# Altium PCB broken_sodimm_stackup.PcbDoc (part 5 of 7)
Units mm, origin at the board's own origin, x right, y up, seen from the top; angles counter-clockwise.
Board outline 69.63 x 30.03 mm, 8 copper layers (TOP, SIGA__, L3, PWR4, L5, L6, SIGB__, BOTTOM), stack 1.2 mm thick; 199 components, 229 nets, 1321 pads, 785 vias.
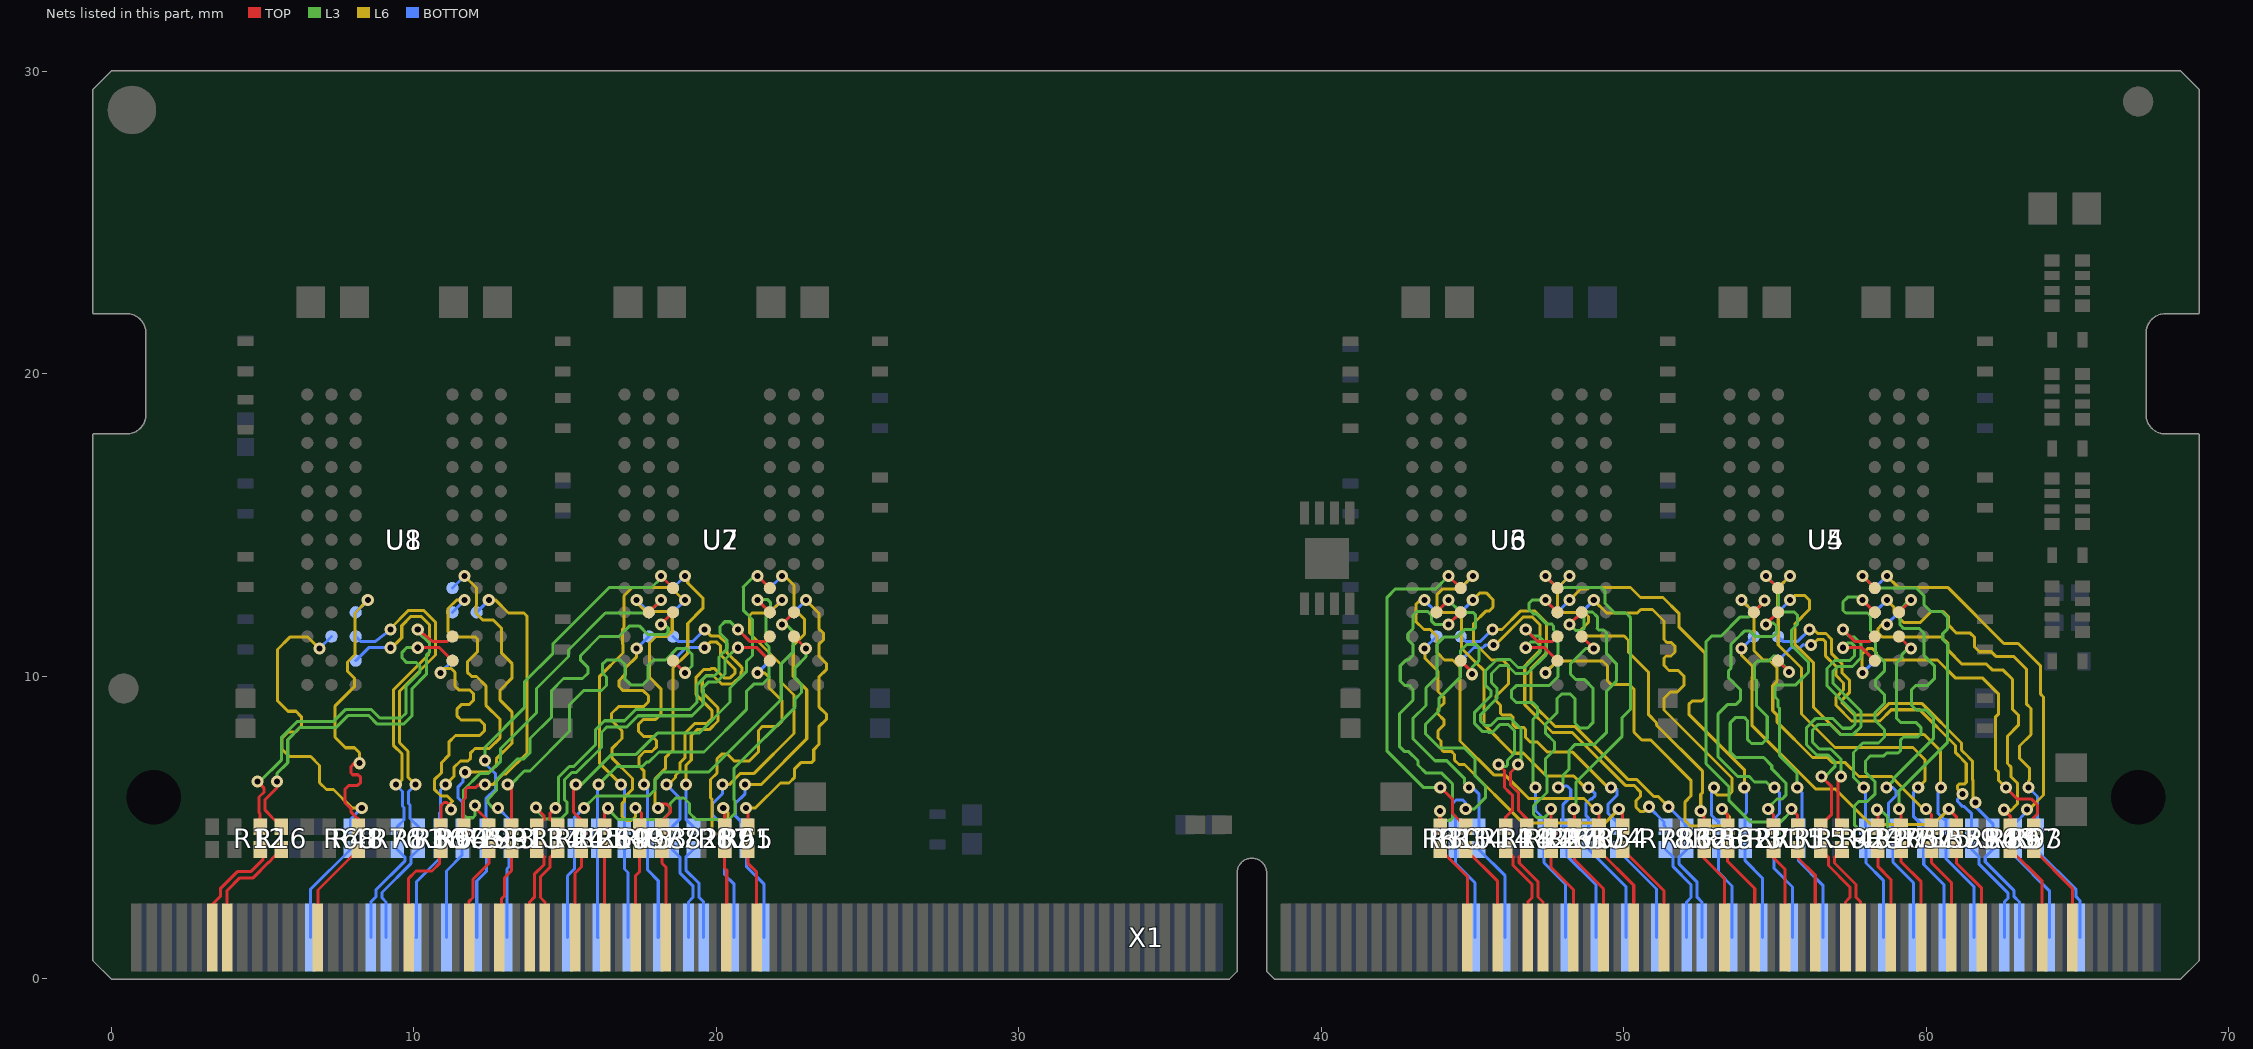
[diagram p10: the nets of this part, all layers, seen from the top]

## Via types
v1: diameter 0.4, hole 0.2, TOP to BOTTOM, tented both sides, 785 vias

## Nets (pads, with @x,y where several pads share a name; then routed paths per layer and width w, separated by ;. In a path a pad name is that pad's centre, name@x,y a point inside that pad or via, vN(x,y) a via of type N, cw(c..) or ccw(c..) an arc to the next point about the centre after c; other vN are vias at no path point) (continued)
DQ10R: R64.2 U8.D8 | length 10.4
  TOP w0.1: R64.2@11.639,5.025 11.62,5.044 11.62,5.896 11.7,5.976 11.7,6.254 11.767,6.321 12.045,6.321 12.142,6.418 v1(12.349,6.418)
  L6 w0.1: v1(12.349,6.418) 12.604,6.418 12.954,6.768 13.045,6.768 13.738,7.461 13.738,11.988 13.634,12.092 13.128,12.092 12.703,12.517 v1(12.473,12.517)
  BOTTOM w0.1: U8.D8@12.073,12.117 v1(12.473,12.517)
DQ11: R90.1 X1.42 | length 3.1
  BOTTOM w0.1: X1.42@11.075,1.365 11.075,3.565 11.59,4.08 R90.1@11.59,4.275
DQ11R: R90.2 U8.E7 | length 11.4
  L6 w0.1: v1(11.673,13.317) 12.073,12.917 12.073,12.351 12.05,12.328 12.05,12.086 12.281,11.855 12.627,11.855 12.898,11.584 12.898,10.762 13.248,10.412 13.248,9.948 12.848,9.548 12.848,9.212 13.248,8.812 13.248,7.798 12.724,7.274 12.724,7.063 12.49,6.829 v1(11.694,6.829)
  BOTTOM w0.1: U8.E7@11.273,12.917 v1(11.673,13.317) ; R90.2@11.59,5.025 11.624,5.059 11.624,5.82 11.448,5.996 11.448,6.334 11.624,6.51 11.624,6.759 v1(11.694,6.829)
DQ12: R68.1 X1.24 | length 3.5
  BOTTOM w0.1: X1.24@6.575,1.365 6.575,2.952 R68.1@7.898,4.275
DQ12R: R68.2 U8.C2 | length 11
  L6 w0.1: v1(6.873,10.917) 6.498,11.292 5.897,11.292 5.49,10.885 5.49,9.188 5.833,8.845 6.097,8.845 6.276,8.666 6.276,8.354 6.087,8.165 5.85,8.165 5.643,7.958 5.643,7.58 5.877,7.346 6.586,7.346 6.88,7.052 6.88,6.483 7.107,6.256 7.336,6.256 7.94,5.652 v1(8.274,5.652)
  BOTTOM w0.1: v1(6.873,10.917) U8.C2@7.273,11.317 ; R68.2@7.898,5.025 7.898,5.276 v1(8.274,5.652)
DQ13: R48.1 X1.25 | length 3.5
  TOP w0.09: X1.25@6.825,1.365 6.825,2.937 R48.1@8.163,4.275
  TOP w0.1: R48.1@8.126,4.316 R48.1@8.163,4.35
DQ13R: R48.2 U8.D3 | length 10.3
  TOP w0.1: R48.2@8.163,5.025 8.163,5.302 8.129,5.302 7.924,5.507 7.924,5.622 7.716,5.83 7.716,6.258 7.853,6.395 8.138,6.395 8.236,6.493 8.236,6.66 8.15,6.746 7.974,6.746 7.915,6.805 7.915,7.015 8.027,7.127 v1(8.202,7.127)
  L6 w0.1: v1(8.202,7.127) 8.202,7.47 8.034,7.639 7.737,7.639 7.387,7.989 7.387,9.014 7.4,9.027 8.04,9.667 8.04,9.931 7.805,10.166 7.805,10.475 8.048,10.718 8.048,12.092 v1(8.473,12.517)
  BOTTOM w0.1: U8.D3@8.073,12.117 v1(8.473,12.517)
DQ14: R86.1 X1.38 | length 3.2
  BOTTOM w0.1: X1.38@10.075,1.365 10.08,1.37 10.08,3.21 10.877,4.007 R86.1@10.877,4.275
DQ14R: R86.2 U8.D7 | length 11.2
  L6 w0.1: v1(11.049,6.418) 11.319,6.688 11.319,6.985 11.538,7.204 11.784,7.204 11.876,7.296 11.876,7.476 12.017,7.617 12.492,7.617 12.848,7.973 12.848,8.573 12.374,9.047 12.374,9.686 12.067,9.993 11.909,9.993 11.763,10.139 11.763,10.477 12.098,10.812 12.098,11.228 12.034,11.292 11.298,11.292 11.127,11.463 11.127,12.241 11.403,12.517 v1(11.673,12.517)
  BOTTOM w0.1: R86.2@10.877,5.025 10.84,5.062 10.84,5.473 10.874,5.507 10.874,6.243 v1(11.049,6.418) ; U8.D7@11.273,12.117 v1(11.673,12.517)
DQ15: R60.1 X1.37 | length 3.6
  TOP w0.1: X1.37@9.825,1.365 9.825,3.322 10.069,3.566 10.595,3.566 10.848,3.819 R60.1@10.848,4.237
DQ15R: R60.2 U8.B7 | length 9.8
  TOP w0.1: R60.2@10.886,5.025 10.886,5.718 10.993,5.825 11.087,5.825 11.202,5.71 v1@11.202,5.604
  L6 w0.1: v1(10.873,10.117) 11.015,10.259 11.231,10.259 11.359,10.131 11.359,9.674 11.48,9.553 11.836,9.553 11.973,9.416 11.973,9.216 11.818,9.061 11.562,9.061 11.426,8.925 11.426,8.683 11.556,8.553 12.177,8.553 12.328,8.402 12.328,8.198 12.173,8.042 11.374,8.042 11.154,7.822 11.154,7.387 10.916,7.149 10.916,6.82 10.674,6.578 10.674,6.262 10.893,6.043 11.101,6.043 11.274,5.87 v1@11.2,5.796
  BOTTOM w0.1: v1(10.873,10.117) U8.B7@11.273,10.517
  other v1: 11.23,5.6
DQ16: R33.1 X1.50 | length 3
  BOTTOM w0.1: X1.50@13.075,1.365 13.075,3.635 13.14,3.7 13.14,4.238 R33.1@13.177,4.275
DQ16R: R33.2 U2.D7 | length 12.5
  TOP w0.1: v1(18.163,11.717) U2.D7@18.563,12.117
  L3 w0.1: v1(12.774,5.652) 12.608,5.652 12.451,5.809 12.451,5.947 12.728,6.224 12.728,6.578 13.424,7.274 13.64,7.274 13.839,7.473 13.839,7.945 14.55,8.656 14.55,9.533 14.945,9.928 15.573,9.928 15.758,10.113 15.758,10.282 15.509,10.531 15.509,10.689 16.135,11.315 16.775,11.315 17.129,11.669 17.443,11.669 17.737,11.375 18.324,11.375 18.406,11.457 18.406,11.59 18.279,11.717 v1(18.163,11.717)
  BOTTOM w0.1: v1(12.774,5.652) 13.177,5.249 R33.2@13.177,5.025
DQ17: R9.1 X1.49 | length 3.1
  TOP w0.1: X1.49@12.825,1.365 12.89,1.43 12.89,2.65 12.99,2.75 12.99,3.34 13.225,3.575 R9.1@13.225,4.275
DQ17R: R9.2 U2.B7 | length 13.1
  TOP w0.1: v1(13.099,6.418) 13.225,6.292 R9.2@13.225,5.025 ; U2.B7@18.563,10.517 v1(18.963,10.117)
  L3 w0.1: v1(13.099,6.418) 13.198,6.418 13.65,6.87 13.832,6.87 15.136,8.174 15.136,9.055 15.609,9.528 16.2,9.528 16.365,9.693 16.365,9.978 16.228,10.115 16.228,10.4 16.363,10.535 16.83,10.535 16.984,10.381 16.984,9.896 17.163,9.717 17.57,9.717 17.738,9.885 17.738,10.363 17.917,10.542 18.318,10.542 18.703,10.927 18.997,10.927 19.19,10.734 19.19,10.344 v1(18.963,10.117)
DQ18: R45.1 X1.62 | length 2.9
  BOTTOM w0.1: R45.1@16.07,4.275 16.07,1.37 X1.62@16.075,1.365
DQ18R: R45.2 U2.D3 | length 12.4
  TOP w0.1: v1(21.363,12.517) U2.D3@21.763,12.117
  L3 w0.1: v1@16.143,6.462 16.703,7.022 17.546,7.022 17.692,7.168 17.765,7.168 18.097,7.5 19.591,7.5 20.988,8.897 20.988,9.498 21.232,9.742 21.518,9.742 21.738,9.962 21.738,10.975 21.631,11.082 21.631,11.963 21.781,12.113 21.781,12.444 21.68,12.545 21.384,12.545 21.363,12.524 v1(21.363,12.517)
  BOTTOM w0.1: R45.2@16.07,5.025 16.06,5.035 16.06,6.379 v1(16.099,6.418)
DQ19: R25.1 X1.63 | length 2.9
  TOP w0.1: R25.1@16.3,4.275 16.3,1.39 X1.63@16.325,1.365
DQ19R: R25.2 U2.C2 | length 13.3
  TOP w0.1: R25.2@16.3,4.95 R25.2@16.3,5.025 16.3,5.578 v1@16.362,5.64 ; U2.C2@22.563,11.317 v1(22.963,10.917)
  L3 w0.1: v1(16.41,5.64) 16.423,5.627 16.423,5.603 16.764,5.262 18.214,5.262 18.463,5.511 18.463,5.791 18.651,5.979 18.93,5.979 19.112,5.797 19.112,5.484 19.334,5.262 20.397,5.262 20.612,5.477 20.612,5.895 20.574,5.933 20.574,6.955 22.601,8.982 22.601,9.254 22.81,9.463 22.81,9.739 22.601,9.948 22.601,10.285 22.963,10.647 v1(22.963,10.917)
DQ20: R29.1 X1.46 | length 3
  BOTTOM w0.1: X1.46@12.075,1.365 12.075,3.235 12.395,3.555 R29.1@12.395,4.275
DQ20R: R29.2 U2.E7 | length 12.4
  TOP w0.1: v1(18.163,13.317) U2.E7@18.563,12.917
  L3 w0.1: v1(12.349,7.218) 12.349,7.659 13.648,8.958 13.648,9.811 14.601,10.764 14.601,11.085 16.452,12.936 17.854,12.936 18.163,13.245 v1(18.163,13.317)
  BOTTOM w0.1: v1(12.349,7.218) 12.349,7.118 12.699,6.768 12.699,6.273 12.374,5.948 12.374,5.046 R29.2@12.395,5.025
DQ21: R5.1 X1.45 | length 3.2
  TOP w0.1: X1.45@11.825,1.365 11.825,2.565 11.95,2.69 11.95,3.29 12.477,3.817 R5.1@12.477,4.275
DQ21R: R5.2 U2.D8 | length 13
  TOP w0.1: v1(12.02,5.73) 12.02,5.656 12.036,5.64 12.477,5.199 R5.2@12.477,5.025 ; U2.D8@17.763,12.117 v1(18.163,12.517)
  L3 w0.1: v1(12.02,5.73) 12.02,5.401 11.943,5.324 11.745,5.324 11.64,5.429 11.64,6.24 12.193,6.793 12.467,6.793 12.867,7.193 12.867,7.611 14.048,8.792 14.048,9.597 15.109,10.658 15.109,10.872 16.327,12.09 17.736,12.09 v1(18.163,12.517)
DQ22: R41.1 X1.58 | length 3
  BOTTOM w0.1: X1.58@15.075,1.365 15.075,3.405 15.3,3.63 R41.1@15.3,4.275
DQ22R: R41.2 U2.D2 | length 12.4
  TOP w0.1: v1(22.163,11.717) U2.D2@22.563,12.117
  L3 w0.1: v1(15.624,5.652) 16.015,6.043 17.757,6.043 17.974,6.26 17.974,6.585 18.23,6.841 19.752,6.841 20.283,7.372 21.588,8.677 22.142,9.231 22.142,10.412 22.538,10.808 22.538,11.478 22.299,11.717 v1(22.163,11.717)
  BOTTOM w0.1: R41.2@15.3,5.025 15.3,5.328 v1(15.624,5.652)
DQ23: R21.1 X1.59 | length 3.1
  TOP w0.1: X1.59@15.325,1.365 15.325,3.49 15.532,3.697 R21.1@15.532,4.275 R21.1@15.532,4.35
DQ23R: R21.2 U2.E3 | length 13.2
  TOP w0.1: v1(15.349,6.418) 15.274,6.343 15.274,5.507 15.532,5.249 R21.2@15.532,5.025 ; v1(21.363,13.317) U2.E3@21.763,12.917
  L3 w0.1: v1(15.349,6.418) 15.533,6.418 16.537,7.422 17.345,7.422 18.045,8.122 19.423,8.122 20.45,9.149 20.45,9.613 20.988,10.151 20.988,10.49 21.189,10.691 21.189,11.879 20.889,12.18 20.889,12.949 20.884,12.954 21.247,13.317 v1(21.363,13.317)
DQ24: R73.1 X1.70 | length 3.1
  BOTTOM w0.1: R73.1@17.724,4.275 17.724,3.596 18.075,3.245 X1.70@18.075,1.365
DQ24R: R73.2 U7.D2 | length 11.1
  L6 w0.1: v1(17.363,12.517) 17.363,12.438 17.659,12.142 18.373,12.142 18.538,11.977 18.538,11.49 18.367,11.319 18,11.319 17.784,11.103 17.784,9.966 18.161,9.589 18.161,8.752 17.989,8.58 17.585,8.58 17.428,8.423 17.428,8.176 17.593,8.011 17.877,8.011 18.013,7.875 18.013,7.655 17.869,7.511 17.624,7.511 17.436,7.323 17.436,7.041 17.599,6.878 v1(17.599,6.418)
  BOTTOM w0.1: v1(17.363,12.517) U7.D2@17.763,12.117 ; v1(17.599,6.418) 17.724,6.293 R73.2@17.724,5.025
DQ25: R53.1 X1.71 | length 3
  TOP w0.1: R53.1@18.199,4.35 R53.1@18.199,4.275 18.199,3.821 18.325,3.695 X1.71@18.325,1.365
DQ25R: R53.2 U7.E3 | length 10.6
  TOP w0.1: v1(18.074,5.652) 18.074,5.797 18.098,5.773 18.36,5.773 18.483,5.65 18.483,5.503 18.199,5.219 R53.2@18.199,5.025 R53.2@18.199,4.95
  L6 w0.1: v1(18.074,5.652) 17.974,5.752 17.974,6.612 18.309,6.947 18.309,7.311 18.561,7.563 18.561,10.272 19.051,10.762 19.051,11.748 19.549,12.246 19.549,12.588 19.051,13.086 19.051,13.22 v1@18.959,13.313
  BOTTOM w0.1: U7.E3@18.563,12.917 v1(18.963,13.317)
DQ26: R65.1 X1.83 | length 3.1
  TOP w0.1: R65.1@21.038,4.35 R65.1@21.038,4.275 21.038,3.822 21.325,3.535 X1.83@21.325,1.365
DQ26R: R65.2 U7.D8 | length 10.4
  TOP w0.1: v1(20.974,5.652) 21.038,5.588 R65.2@21.038,5.025 R65.2@21.038,4.95
  L6 w0.1: v1(20.974,5.652) 21.293,5.652 22.117,6.476 22.396,6.476 22.585,6.665 22.585,6.944 22.788,7.147 23.14,7.147 23.216,7.223 23.216,7.575 23.385,7.744 23.385,8.334 23.642,8.591 23.642,8.74 23.385,8.997 23.385,9.974 23.631,10.22 23.631,10.426 23.385,10.672 23.385,11.056 23.544,11.215 23.544,11.417 23.385,11.576 23.385,12.095 v1(22.963,12.517)
  BOTTOM w0.1: U7.D8@22.563,12.117 v1(22.963,12.517)
DQ27: R91.1 X1.84 | length 3.2
  BOTTOM w0.1: R91.1@20.987,4.275 20.987,3.713 21.575,3.125 X1.84@21.575,1.365
DQ27R: R91.2 U7.E7 | length 11
  L6 w0.1: v1(20.949,6.418) 21.47,6.418 22.985,7.933 22.985,9.552 22.538,9.999 22.538,11.022 22.91,11.394 22.91,11.889 22.563,12.236 22.563,12.683 22.57,12.69 22.57,13.005 22.258,13.317 v1(22.163,13.317)
  BOTTOM w0.1: v1(20.949,6.418) 20.949,6.122 20.624,5.797 20.624,5.388 R91.2@20.987,5.025 ; U7.E7@21.763,12.917 v1(22.163,13.317)
DQ28: R69.1 X1.66 | length 3
  BOTTOM w0.1: R69.1@16.957,4.275 16.957,3.633 17.075,3.515 X1.66@17.075,1.365
DQ28R: R69.2 U7.D3 | length 11.3
  L6 w0.1: v1(16.849,6.418) 16.129,7.138 16.129,9.988 16.913,10.772 16.913,11.062 16.901,11.074 16.901,11.56 16.942,11.601 16.942,12.662 17.218,12.938 18.492,12.938 v1@18.858,12.572 ; v1@18.883,12.597 v1(18.963,12.517)
  BOTTOM w0.1: v1(16.849,6.418) 16.957,6.31 R69.2@16.957,5.025 R69.2@16.957,4.95 ; U7.D3@18.563,12.117 v1(18.963,12.517)
DQ29: R49.1 X1.67 | length 3
  TOP w0.1: X1.67@17.325,1.365 17.325,3.41 17.46,3.545 R49.1@17.46,4.275 R49.1@17.46,4.35
DQ29R: R49.2 U7.C2 | length 10.5
  TOP w0.1: v1(17.324,5.652) 17.348,5.652 17.519,5.481 17.519,5.084 R49.2@17.46,5.025 R49.2@17.46,4.95
  L6 w0.1: v1(17.324,5.652) 17.324,5.361 17.194,5.231 17.018,5.231 16.884,5.365 16.884,5.803 16.952,5.871 16.952,5.991 17.224,6.263 17.224,6.625 16.54,7.309 16.54,7.607 16.876,7.943 16.876,8.2 16.532,8.544 16.532,8.77 16.76,8.998 17.589,8.998 17.752,9.161 17.752,9.357 17.584,9.525 16.916,9.525 16.775,9.666 16.775,9.854 16.988,10.067 16.988,10.273 17.363,10.648 v1(17.363,10.917)
  BOTTOM w0.1: v1(17.363,10.917) U7.C2@17.763,11.317
DQ30: R61.1 X1.79 | length 3
  TOP w0.1: R61.1@20.268,4.35 R61.1@20.268,4.275 20.268,3.662 20.34,3.59 20.34,1.38 X1.79@20.325,1.365
DQ30R: R61.2 U7.B7 | length 10.5
  TOP w0.1: v1(20.224,5.652) 20.268,5.608 R61.2@20.268,5.025 R61.2@20.268,4.95
  L6 w0.1: v1(20.224,5.652) 20.378,5.498 20.378,4.891 20.28,4.793 19.963,4.793 19.849,4.907 19.849,5.94 19.805,5.984 19.805,6.586 20.018,6.799 20.018,7.273 20.17,7.425 20.363,7.425 20.594,7.194 21.079,7.194 21.388,7.503 21.388,8.21 21.525,8.347 21.989,8.347 22.16,8.518 22.16,9.199 21.729,9.63 21.729,9.975 21.587,10.117 v1(21.363,10.117)
  BOTTOM w0.1: v1(21.363,10.117) U7.B7@21.763,10.517
DQ31: R87.1 X1.80 | length 3
  BOTTOM w0.1: R87.1@20.269,4.275 20.269,3.451 20.575,3.145 X1.80@20.575,1.365
DQ31R: R87.2 U7.D7 | length 11.1
  L6 w0.1: v1(20.199,6.418) 20.419,6.418 20.794,6.793 21.248,6.793 22.566,8.111 22.566,9.379 22.134,9.811 22.134,10.39 21.09,11.434 21.09,12.004 21.178,12.092 21.738,12.092 v1(22.163,12.517)
  BOTTOM w0.1: v1(20.199,6.418) 20.199,6.122 19.874,5.797 19.874,5.484 19.87,5.48 19.87,5.424 R87.2@20.269,5.025 ; U7.D7@21.763,12.117 v1(22.163,12.517)
DQ32: R34.1 X1.174 | length 3.3
  BOTTOM w0.1: R34.1@45.205,4.275 46.075,3.405 X1.174@46.075,1.365
DQ32R: R34.2 U3.D8 | length 11.2
  TOP w0.1: U3.D8@43.803,12.117 v1(44.203,12.517)
  L3 w0.1: v1(44.203,12.517) 44.618,12.103 45.025,12.103 45.088,12.04 45.088,11.604 45.024,11.54 44.722,11.54 44.474,11.292 44.048,11.292 43.828,11.072 43.828,9.993 43.456,9.621 43.456,9.037 43.022,8.603 43.022,7.944 43.757,7.209 44.143,7.209 44.734,6.618 44.734,6.463 v1(44.879,6.318)
  BOTTOM w0.1: v1(44.879,6.318) 44.941,6.38 45.205,6.116 R34.2@45.205,5.025
DQ33: R10.1 X1.173 | length 3.3
  TOP w0.1: R10.1@44.772,4.275 45.825,3.222 X1.173@45.825,1.365
DQ33R: R10.2 U3.E7 | length 11.9
  TOP w0.1: v1(43.929,6.318) 43.952,6.318 44.33,5.94 44.33,5.467 R10.2@44.772,5.025 ; v1(44.203,13.317) U3.E7@44.603,12.917
  L3 w0.1: v1(43.929,6.318) 43.378,6.318 42.174,7.522 42.174,12.618 42.448,12.892 43.778,12.892 v1(44.203,13.317)
DQ34: R26.1 X1.187 | length 3.3
  TOP w0.1: R26.1@48.365,4.275 48.365,3.935 49.325,2.975 X1.187@49.325,1.365
DQ34R: R26.2 U3.E3 | length 12
  TOP w0.1: v1(47.403,13.317) U3.E3@47.803,12.917 ; v1(48.34,5.61) 48.365,5.585 R26.2@48.365,5.025
  L3 w0.1: v1(47.403,13.317) 47.778,12.942 49.245,12.942 49.378,12.809 49.378,12.408 49.694,12.092 50.066,12.092 50.223,11.935 50.223,8.922 49.942,8.641 49.942,8.02 48.409,6.487 48.409,5.619 48.35,5.56 48.34,5.57 v1(48.34,5.61)
DQ35: R46.1 X1.186 | length 3.3
  BOTTOM w0.1: R46.1@48.111,4.275 48.111,4.069 49.075,3.105 X1.186@49.075,1.365
DQ35R: R46.2 U3.D2 | length 11.3
  TOP w0.1: v1(48.203,11.717) U3.D2@48.603,12.117
  L3 w0.1: v1(47.829,6.318) 47.982,6.471 47.982,6.724 48.182,6.924 48.182,7.543 48.39,7.751 49.028,7.751 49.428,8.151 49.428,9.517 49.75,9.839 49.75,10.42 49.428,10.742 49.428,11.434 49.332,11.53 49.166,11.53 49.116,11.58 49.122,11.586 49.122,11.965 48.961,12.126 48.752,12.126 48.676,12.05 48.676,11.571 48.627,11.522 48.398,11.522 v1(48.203,11.717)
  BOTTOM w0.1: v1(47.829,6.318) 47.886,6.375 48.123,6.375 48.242,6.256 48.242,6.022 47.99,5.77 47.99,5.755 47.99,5.465 47.99,5.025 R46.2@48.111,5.025
DQ36: R30.1 X1.170 | length 3.2
  BOTTOM w0.1: R30.1@44.429,4.275 44.429,3.821 45.075,3.175 X1.170@45.075,1.365
DQ36R: R30.2 U3.B7 | length 11.3
  TOP w0.1: U3.B7@44.603,10.517 44.99,10.13 44.98,10.12 v1(44.98,10.07)
  L3 w0.1: v1(44.77,5.61) 45.045,5.61 45.418,5.983 45.418,6.376 45.07,6.724 45.07,7.281 44.724,7.627 43.914,7.627 43.447,8.094 43.447,8.422 43.892,8.867 43.892,9.276 44.601,9.985 44.601,10.853 44.796,11.048 45.121,11.048 45.213,10.956 45.213,10.535 44.98,10.302 v1(44.98,10.07)
  BOTTOM w0.1: R30.2@44.429,5.025 44.429,5.359 44.34,5.448 44.34,5.8 44.448,5.908 44.675,5.908 44.77,5.813 v1(44.77,5.61)
DQ37: R6.1 X1.169 | length 3.2
  TOP w0.1: R6.1@43.984,4.217 44.825,3.376 X1.169@44.825,1.365
DQ37R: R6.2 U3.D7 | length 12
  TOP w0.1: R6.2@43.926,4.95 R6.2@43.926,5.025 v1(43.926,5.55) ; v1(44.203,11.717) U3.D7@44.603,12.117
  L3 w0.1: v1(43.926,5.55) 43.926,5.304 43.996,5.234 44.258,5.234 44.332,5.308 44.332,6.445 43.977,6.8 43.462,6.8 43.195,7.067 43.195,7.205 42.889,7.511 42.751,7.511 42.574,7.688 42.574,8.758 43.028,9.212 43.028,9.573 42.899,9.702 42.748,9.702 42.605,9.845 42.605,10.349 42.791,10.535 42.866,10.535 43.028,10.697 43.028,11.044 42.86,11.212 42.86,11.409 43.028,11.577 43.028,12.023 43.145,12.14 43.518,12.14 43.643,12.015 43.643,11.822 43.748,11.717 v1(44.203,11.717)
DQ38: R22.1 X1.183 | length 3.2
  TOP w0.1: R22.1@47.59,4.275 47.59,3.69 48.325,2.955 X1.183@48.325,1.365
DQ38R: R22.2 U3.C2 | length 12
  TOP w0.1: R22.2@47.59,5.025 v1(47.59,5.61) ; U3.C2@48.603,11.317 v1(49.003,10.917)
  L3 w0.1: v1(47.59,5.61) 47.59,5.55 47.369,5.329 47.126,5.329 47.011,5.444 47.011,5.72 47.454,6.163 47.454,6.698 47.401,6.751 47.401,7.269 47.706,7.574 47.706,7.831 47.403,8.134 47.403,8.404 47.79,8.791 47.79,9.267 47.94,9.417 48.225,9.417 48.382,9.26 48.382,8.46 48.549,8.293 48.801,8.293 48.973,8.465 48.973,9.617 48.7,9.89 48.417,9.89 48.236,10.071 48.236,10.417 48.736,10.917 v1(49.003,10.917)
DQ39: R42.1 X1.182 | length 3.2
  BOTTOM w0.1: R42.1@47.361,4.275 47.361,3.839 48.075,3.125 X1.182@48.075,1.365
DQ39R: R42.2 U3.D3 | length 11.3
  TOP w0.1: v1(47.403,12.517) U3.D3@47.803,12.117
  L3 w0.1: v1(47.079,6.318) 46.991,6.406 46.991,8.579 47.149,8.737 47.149,8.97 46.983,9.136 46.438,9.136 46.284,9.29 46.284,9.54 46.436,9.692 47.523,9.692 47.828,9.997 47.828,11.39 47.675,11.543 47.675,11.661 47.601,11.735 47.434,11.735 47.103,12.066 47.009,12.066 46.854,12.221 46.854,12.408 46.963,12.517 v1(47.403,12.517)
  BOTTOM w0.1: v1(47.079,6.318) 47.079,5.566 47.361,5.284 R42.2@47.361,5.025
DQ40: R54.1 X1.195 | length 3.5
  TOP w0.1: R54.1@49.959,4.275 51.325,2.909 X1.195@51.325,1.365 ; R54.1@49.959,4.35 R54.1@49.996,4.311
DQ40R: R54.2 U6.C2 | length 12.3
  TOP w0.1: v1(49.83,5.61) 49.959,5.481 R54.2@49.959,5.025
  L6 w0.1: v1(43.403,10.917) 43.428,10.892 43.428,10.588 43.853,10.163 43.853,9.498 44.056,9.295 44.056,9.121 43.853,8.918 43.853,8.756 44.045,8.564 44.045,8.392 43.853,8.2 43.853,7.962 43.955,7.859 43.955,7.595 44.03,7.52 44.294,7.52 44.398,7.416 44.398,7.229 44.545,7.082 44.733,7.082 46.672,5.143 49.363,5.143 v1(49.83,5.61)
  BOTTOM w0.1: v1(43.403,10.917) U6.C2@43.803,11.317
DQ41: R74.1 X1.194 | length 3.5
  BOTTOM w0.1: R74.1@49.771,4.275 51.075,2.971 X1.194@51.075,1.365
DQ41R: R74.2 U6.D3 | length 13.1
  L6 w0.1: v1(45.003,12.517) 45.245,12.759 45.445,12.759 45.673,12.531 45.673,12.284 45.555,12.166 45.452,12.166 45.03,11.744 45.03,11.132 45.62,10.542 45.993,10.542 46.185,10.35 46.185,9.753 45.778,9.346 45.778,9.186 45.921,9.043 45.921,8.776 45.978,8.719 46.26,8.719 46.339,8.64 46.339,8.39 46.414,8.316 46.679,8.316 46.745,8.249 46.745,7.983 46.9,7.828 47.136,7.828 47.473,7.491 48.307,7.491 49.48,6.318 v1(49.579,6.318)
  BOTTOM w0.1: U6.D3@44.603,12.117 v1(45.003,12.517) ; v1(49.579,6.318) 49.706,6.318 49.777,6.247 49.777,6.075 49.48,5.778 49.48,5.465 49.771,5.174 R74.2@49.771,5.025
DQ42: R66.1 X1.207 | length 3.4
  TOP w0.1: R66.1@53.431,4.35 R66.1@53.431,4.275 53.431,3.879 54.325,2.985 X1.207@54.325,1.365
DQ42R: R66.2 U6.B7 | length 12.5
  TOP w0.1: v1(53.24,5.61) 53.431,5.419 R66.2@53.431,5.025
  L6 w0.1: v1(47.403,10.117) 47.793,10.507 49.294,10.507 49.454,10.347 49.454,9.845 49.564,9.735 50.169,9.735 50.33,9.574 50.33,8.154 50.592,7.892 50.888,7.892 52.213,6.567 52.213,6.041 52.024,5.852 52.024,5.225 52.196,5.053 53.317,5.053 53.482,5.218 53.482,5.368 v1(53.24,5.61)
  BOTTOM w0.1: v1(47.403,10.117) U6.B7@47.803,10.517
DQ43: R92.1 X1.208 | length 3.2
  BOTTOM w0.1: R92.1@54.006,4.35 R92.1@54.006,4.275 54.006,3.904 54.575,3.335 X1.208@54.575,1.365
DQ43R: R92.2 U6.D7 | length 13.4
  L6 w0.1: v1(48.203,12.517) 48.581,12.895 48.815,12.895 48.858,12.938 50.219,12.938 50.55,12.607 51.295,12.607 51.816,12.086 51.816,11.637 52.688,10.765 52.688,9.297 52.577,9.186 52.256,9.186 52.146,9.076 52.146,8.746 53.979,6.913 v1(53.979,6.318)
  BOTTOM w0.1: U6.D7@47.803,12.117 v1(48.203,12.517) ; v1(53.979,6.318) 54.083,6.318 54.054,6.289 54.054,5.495 54.006,5.447 R92.2@54.006,5.025
DQ44: R50.1 X1.191 | length 3.4
  TOP w0.1: R50.1@49.177,4.275 49.177,4.243 50.325,3.095 X1.191@50.325,1.365 ; R50.1@49.177,4.35 R50.1@49.213,4.304
DQ44R: R50.2 U6.D2 | length 12.4
  TOP w0.1: v1(49.1,5.61) 49.177,5.533 R50.2@49.177,5.025
  L6 w0.1: v1(43.403,12.517) 43.262,12.517 43.122,12.377 43.122,11.815 43.392,11.545 43.6,11.545 43.828,11.317 43.828,10.78 44.068,10.54 44.335,10.54 44.58,10.295 44.58,7.865 45.715,6.73 46.081,6.73 46.851,5.96 48.68,5.96 49.03,5.61 v1(49.1,5.61)
  BOTTOM w0.1: v1(43.403,12.517) U6.D2@43.803,12.117
DQ45: R70.1 X1.190 | length 3.4
  BOTTOM w0.1: R70.1@48.835,4.275 50.075,3.035 X1.190@50.075,1.365
DQ45R: R70.2 U6.E3 | length 13.1
  L6 w0.1: v1(45.003,13.317) 44.578,12.892 44.011,12.892 43.828,12.709 43.828,12.305 44.022,12.111 44.43,12.111 44.628,11.913 44.628,10.932 45.068,10.492 45.378,10.182 45.378,8.396 46.317,7.457 46.683,7.457 47.436,6.704 48.337,6.704 48.723,6.318 v1(48.829,6.318)
  BOTTOM w0.1: U6.E3@44.603,12.917 v1(45.003,13.317) ; v1(48.829,6.318) 48.854,6.318 49.05,6.122 49.05,6.055 48.94,5.946 48.895,5.946 48.74,5.791 48.74,5.405 48.835,5.31 R70.2@48.835,5.025
DQ46: R62.1 X1.203 | length 3.3
  TOP w0.1: R62.1@52.649,4.35 R62.1@52.649,4.275 52.649,3.981 53.325,3.305 X1.203@53.325,1.365
DQ46R: R62.2 U6.E7 | length 12.6
  TOP w0.1: v1(52.54,5.55) 52.649,5.441 R62.2@52.649,5.025
  L6 w0.1: v1(48.203,13.317) 47.803,12.917 47.803,12.219 47.905,12.117 48.692,12.117 48.83,11.979 48.83,11.792 48.57,11.532 48.57,11.407 48.647,11.33 50.007,11.33 50.153,11.184 50.153,10.793 50.819,10.127 50.819,8.725 51.08,8.464 51.08,8.385 52.604,6.861 52.604,6.163 52.54,6.098 v1(52.54,5.55)
  BOTTOM w0.1: U6.E7@47.803,12.917 v1(48.203,13.317)
DQ47: R88.1 X1.204 | length 3.1
  BOTTOM w0.1: R88.1@53.133,4.275 53.133,3.507 53.575,3.065 X1.204@53.575,1.365
DQ47R: R88.2 U6.D8 | length 13.5
  L6 w0.1: v1(49.003,12.517) 49.428,12.092 50.445,12.092 50.56,12.207 50.943,12.207 51.322,11.828 51.322,11.214 51.419,11.117 51.564,11.117 51.687,10.994 51.687,10.802 51.554,10.669 51.394,10.669 51.322,10.597 51.322,10.364 51.493,10.193 51.798,10.193 51.988,10.003 51.988,9.705 51.765,9.482 51.533,9.482 51.322,9.271 51.322,8.89 53.576,6.636 53.576,6.187 53.459,6.07 53.095,6.07 52.979,6.186 v1(52.979,6.318)
  BOTTOM w0.1: U6.D8@48.603,12.117 v1(49.003,12.517) ; v1(52.979,6.318) 52.89,6.229 52.89,5.415 53.095,5.21 53.133,5.21 R88.2@53.133,5.025
DQ48: R35.1 X1.216 | length 3.2
  BOTTOM w0.1: R35.1@55.778,4.275 55.778,3.892 56.575,3.095 X1.216@56.575,1.365
DQ48R: R35.2 U4.E7 | length 11.1
  TOP w0.1: v1(54.693,13.317) U4.E7@55.093,12.917
  L3 w0.1: v1(54.693,13.317) 55.11,12.9 55.11,12.25 55.228,12.132 55.619,12.132 55.742,12.009 55.742,11.736 55.538,11.532 55.538,11.028 56.099,10.467 56.099,10.136 55.68,9.717 55.077,9.717 54.99,9.63 54.99,9.32 55.093,9.217 55.093,8.984 55.147,8.93 55.147,7.377 55.729,6.795 v1(55.729,6.318)
  BOTTOM w0.1: v1(55.729,6.318) 55.89,6.157 55.89,5.137 R35.2@55.778,5.025
DQ49: R11.1 X1.215 | length 3.2
  TOP w0.1: R11.1@55.741,4.35 R11.1@55.741,4.275 55.741,4.009 56.325,3.425 X1.215@56.325,1.365
DQ49R: R11.2 U4.D8 | length 11.9
  TOP w0.1: U4.D8@54.293,12.117 54.67,12.494 54.654,12.51 v1(54.65,12.51) ; v1(55.54,5.61) 55.741,5.409 R11.2@55.741,5.025
  L3 w0.1: v1(54.65,12.51) 54.654,12.51 54.67,12.494 54.141,11.965 53.848,11.965 53.213,11.33 52.9,11.33 52.715,11.145 52.715,7.112 53.468,6.359 53.468,5.902 54.193,5.177 55.167,5.177 55.54,5.55 v1(55.54,5.61)
DQ50: R47.1 X1.228 | length 3.2
  BOTTOM w0.1: R47.1@58.896,4.275 58.896,3.854 59.575,3.175 X1.228@59.575,1.365
DQ50R: R47.2 U4.D2 | length 11.1
  TOP w0.1: U4.D2@59.093,12.117 v1(59.493,12.517)
  L3 w0.1: v1(58.679,6.318) 58.906,6.545 58.906,6.614 60.23,7.938 60.23,8.646 59.997,8.879 59.674,8.879 59.503,9.05 59.503,9.549 59.654,9.7 60.041,9.7 60.273,9.932 60.273,10.337 59.913,10.697 59.913,11.434 59.772,11.575 59.254,11.575 59.126,11.703 59.126,12.209 59.434,12.517 v1(59.493,12.517)
  BOTTOM w0.1: v1(58.679,6.318) 58.892,6.318 58.987,6.223 58.987,6.042 58.74,5.795 58.74,5.181 R47.2@58.896,5.025
DQ51: R27.1 X1.229 | length 3.2
  TOP w0.1: R27.1@59.161,4.275 59.161,3.869 59.825,3.205 X1.229@59.825,1.365
DQ51R: R27.2 U4.E3 | length 11.9
  TOP w0.1: v1(57.893,13.317) U4.E3@58.293,12.917 ; v1(59.1,5.61) 59.161,5.549 R27.2@59.161,5.025
  L3 w0.1: v1(57.893,13.317) 58.291,12.919 59.664,12.919 59.918,12.665 59.918,12.362 60.139,12.141 60.506,12.141 60.704,11.943 60.704,11.575 60.54,11.411 60.54,11.215 60.704,11.051 60.704,7.824 59.1,6.22 v1(59.1,5.61)
DQ52: R7.1 X1.211 | length 3.1
  TOP w0.1: R7.1@54.946,4.35 R7.1@54.946,4.275 54.946,4.004 55.325,3.625 X1.211@55.325,1.365
DQ52R: R7.2 U4.B7 | length 12
  TOP w0.1: v1(54.77,5.61) 54.946,5.434 R7.2@54.946,5.025 ; U4.B7@55.093,10.517 55.46,10.15 v1(55.46,10.14)
  L3 w0.1: v1(54.77,5.61) 54.77,5.655 55.058,5.943 55.23,5.943 55.354,6.067 55.354,6.476 54.887,6.943 54.887,7.047 54.618,7.316 53.697,7.316 53.515,7.498 53.515,8.462 53.696,8.643 53.973,8.643 54.092,8.524 54.092,7.904 54.216,7.78 54.573,7.78 54.738,7.945 54.738,8.672 54.39,9.02 54.39,9.86 54.32,9.93 54.32,10.418 54.402,10.5 54.775,10.5 54.95,10.675 55.082,10.675 55.163,10.594 55.163,10.49 55.475,10.178 v1@55.475,10.135 ; v1(55.46,10.14) 55.46,10.132 v1@55.475,10.117
DQ53: R31.1 X1.212 | length 3.2
  BOTTOM w0.1: R31.1@54.958,4.275 54.958,3.652 55.575,3.035 X1.212@55.575,1.365
DQ53R: R31.2 U4.D7 | length 11.1
  TOP w0.1: v1(54.693,11.717) U4.D7@55.093,12.117
  L3 w0.1: v1(54.693,11.717) 54.738,11.762 54.94,11.762 55.041,11.661 55.041,11.433 54.918,11.31 54.355,11.31 54.173,11.492 53.982,11.492 53.757,11.267 53.748,11.267 53.543,11.062 53.543,10.267 53.456,10.18 53.456,9.951 53.858,9.549 53.858,9.226 53.696,9.064 53.419,9.064 53.115,8.76 53.115,7.332 53.754,6.693 54.134,6.693 54.318,6.509 54.705,6.509 54.896,6.318 v1(54.979,6.318)
  BOTTOM w0.1: R31.2@54.958,5.025 54.958,5.283 55.14,5.465 55.14,6.157 v1(54.979,6.318)
DQ54: R43.1 X1.224 | length 3.1
  BOTTOM w0.1: R43.1@58.002,4.275 58.002,3.828 58.575,3.255 X1.224@58.575,1.365
DQ54R: R43.2 U4.D3 | length 11.1
  TOP w0.1: v1(57.893,12.517) U4.D3@58.293,12.117
  L3 w0.1: v1(57.893,12.517) 57.795,12.615 57.399,12.615 57.245,12.461 57.245,12.179 57.334,12.09 58.05,12.09 58.152,11.988 58.152,11.516 58.318,11.35 58.318,10.762 58.618,10.462 58.618,10.187 58.321,9.89 58.321,9.681 58.618,9.383 58.618,9.116 58.304,8.802 58.304,8.539 58.612,8.231 58.612,7.991 58.414,7.793 57.897,7.793 57.586,7.482 57.586,6.661 v1(57.929,6.318)
  BOTTOM w0.1: v1(57.929,6.318) 57.99,6.257 57.99,5.037 R43.2@58.002,5.025
DQ55: R23.1 X1.225 | length 3.1
  TOP w0.1: R23.1@58.393,4.275 58.393,3.717 58.825,3.285 X1.225@58.825,1.365
DQ55R: R23.2 U4.C2 | length 12
  TOP w0.1: v1(58.37,5.59) 58.393,5.567 R23.2@58.393,5.025 ; U4.C2@59.093,11.317 v1(59.493,10.917)
  L3 w0.1: v1(58.37,5.59) 58.481,5.59 58.521,5.55 58.721,5.35 58.721,4.983 58.648,4.91 57.791,4.91 57.626,5.075 57.626,5.727 57.768,5.869 58.055,5.869 58.304,6.118 58.304,6.509 57.986,6.827 57.986,7.204 58.152,7.37 58.592,7.37 58.688,7.466 59.065,7.466 59.15,7.551 59.15,7.901 59.241,7.992 59.718,7.992 59.817,8.091 59.817,8.313 59.651,8.479 59.146,8.479 59.018,8.607 59.018,10.442 59.186,10.61 59.186,10.716 59.387,10.917 v1(59.493,10.917)
DQ56: R55.1 X1.237 | length 3.3
  TOP w0.1: R55.1@60.989,4.35 R55.1@60.989,4.275 60.989,3.831 61.825,2.995 X1.237@61.825,1.365
DQ56R: R55.2 U5.C2 | length 12
  TOP w0.1: v1(60.74,5.61) 60.989,5.361 R55.2@60.989,5.025
  L6 w0.1: v1@53.881,10.917 53.881,10.703 54.243,10.341 54.243,9.972 54.23,9.959 54.23,8.38 56.33,6.28 56.98,6.28 58.162,5.098 60.228,5.098 v1(60.74,5.61)
  BOTTOM w0.1: v1(53.893,10.917) U5.C2@54.293,11.317
DQ57: R75.1 X1.236 | length 3.3
  BOTTOM w0.1: R75.1@60.643,4.275 60.643,3.977 61.575,3.045 X1.236@61.575,1.365
DQ57R: R75.2 U5.D3 | length 12.8
  L6 w0.1: v1(55.493,12.517) 55.644,12.668 55.983,12.668 56.13,12.521 56.13,12.212 55.66,11.742 55.66,11.046 55.706,11 55.71,11 56.271,10.439 56.271,8.972 57.167,8.076 59.925,8.076 60.465,7.536 60.465,6.332 v1(60.479,6.318)
  BOTTOM w0.1: U5.D3@55.093,12.117 v1(55.493,12.517) ; v1(60.479,6.318) 60.39,6.229 60.39,5.465 60.595,5.26 60.643,5.26 R75.2@60.643,5.025
DQ58: R67.1 X1.249 | length 3.5
  TOP w0.1: R67.1@63.545,4.275 64.825,2.995 X1.249@64.825,1.365 ; R67.1@63.545,4.35 R67.1@63.582,4.313
DQ58R: R67.2 U5.B7 | length 11.8
  TOP w0.1: v1(62.629,6.318) 62.997,5.95 63.465,5.95 63.67,5.745 63.67,5.455 63.545,5.33 R67.2@63.545,5.025
  L6 w0.1: v1(57.893,10.117) 57.869,10.141 57.869,10.728 58.066,10.925 58.202,10.925 58.343,10.784 58.343,10.638 58.439,10.542 60.366,10.542 60.969,9.939 61.862,9.939 62.39,9.411 62.39,8.761 62.278,8.649 62.278,6.936 62.39,6.824 62.39,6.557 v1(62.629,6.318)
  BOTTOM w0.1: v1(57.893,10.117) U5.B7@58.293,10.517
DQ59: R93.1 X1.250 | length 3.5
  BOTTOM w0.1: R93.1@63.658,4.275 63.658,4.232 64.95,2.94 64.95,2.71 65.075,2.585 X1.250@65.075,1.365
DQ59R: R93.2 U5.D7 | length 12.6
  L6 w0.1: v1(58.693,12.517) 58.934,12.276 58.934,12.094 59.248,11.78 59.799,11.78 60.154,12.135 60.555,12.135 60.735,11.955 60.735,11.687 60.996,11.426 61.451,11.426 61.596,11.281 61.596,10.97 61.754,10.812 62.146,10.812 62.309,10.649 62.896,10.649 63.303,10.241 63.303,9.091 63.457,8.937 63.457,8.072 63.08,7.695 63.08,7.287 63.4,6.967 63.4,6.568 63.379,6.547 v1(63.379,6.318)
  BOTTOM w0.1: U5.D7@58.293,12.117 v1(58.693,12.517) ; v1(63.379,6.318) 63.67,6.027 63.67,5.037 R93.2@63.658,5.025
DQ60: R71.1 X1.232 | length 3.2
  BOTTOM w0.1: R71.1@59.912,4.275 59.912,3.778 60.575,3.115 X1.232@60.575,1.365
DQ60R: R71.2 U5.E3 | length 12.9
  L6 w0.1: v1(55.493,13.317) 55.102,12.926 55.102,12.721 55.072,12.692 55.072,12.22 55.102,12.19 55.102,11.038 55.868,10.272 55.868,8.757 56.98,7.645 59.556,7.645 59.955,7.246 59.955,6.544 v1(59.729,6.318)
  BOTTOM w0.1: U5.E3@55.093,12.917 v1(55.493,13.317) ; v1(59.729,6.318) 59.58,6.169 59.58,5.357 R71.2@59.912,5.025
DQ61: R51.1 X1.233 | length 3.3
  TOP w0.1: R51.1@60.169,4.35 R51.1@60.169,4.275 60.169,3.841 60.825,3.185 X1.233@60.825,1.365
DQ61R: R51.2 U5.D2 | length 12.1
  TOP w0.1: v1(59.99,5.61) 60.169,5.431 R51.2@60.169,5.025
  L6 w0.1: v1(53.893,12.517) 54.302,12.108 54.302,10.848 54.608,10.542 54.798,10.542 55.068,10.272 55.068,9.84 54.92,9.692 54.92,8.864 55.068,8.716 55.068,8.484 56.233,7.319 56.726,7.319 56.888,7.157 57.305,7.157 57.771,6.69 58.85,6.69 59.354,6.163 59.907,5.61 v1(59.99,5.61)
  BOTTOM w0.1: v1(53.893,12.517) U5.D2@54.293,12.117
DQ62: R63.1 X1.245 | length 3.3
  TOP w0.1: R63.1@62.775,4.275 63.825,3.225 X1.245@63.825,1.365
DQ62R: R63.2 U5.D8 | length 11.9
  TOP w0.1: v1(62.56,5.59) 62.775,5.375 R63.2@62.775,5.025
  L6 w0.1: v1(58.693,11.717) 58.543,11.717 58.406,11.58 58.406,11.431 58.54,11.297 60.493,11.297 60.718,11.072 60.718,10.864 61.179,10.403 61.988,10.403 62.188,10.203 62.543,10.203 62.845,9.901 62.845,8.91 63.037,8.718 63.037,8.38 62.678,8.021 62.678,7.118 62.79,7.006 62.79,6.687 63.004,6.473 63.004,5.779 62.97,5.745 62.97,5.743 62.777,5.55 62.737,5.59 v1(62.56,5.59)
  BOTTOM w0.1: v1(58.693,11.717) U5.D8@59.093,12.117
DQ63: R89.1 X1.246 | length 3.4
  BOTTOM w0.1: R89.1@62.927,4.275 62.927,4.043 64.075,2.895 X1.246@64.075,1.365
DQ63R: R89.2 U5.E7 | length 12.7
  L6 w0.1: v1(58.693,13.317) 59.068,12.942 60.705,12.942 62.561,11.086 63.035,11.086 63.777,10.344 63.777,9.408 63.868,9.317 63.868,6.078 63.35,5.56 63.32,5.59 v1(63.32,5.6)
  BOTTOM w0.1: U5.E7@58.293,12.917 v1(58.693,13.317) ; R89.2@62.927,5.025 62.927,5.137 63.32,5.53 v1(63.32,5.6)
DQS0_N: R12.1 X1.11 | length 3.9
  TOP w0.1: X1.11@3.325,1.365 3.325,2.445 3.6,2.72 3.6,2.98 4.16,3.54 4.599,3.54 5.015,3.955 5.015,4.177 R12.1@4.917,4.275
DQS0_P: R16.1 X1.13 | length 3.9
  TOP w0.1: X1.13@3.825,1.365 3.825,2.922 4.243,3.34 4.682,3.34 5.192,3.85 5.204,3.85 5.292,3.938 5.292,3.95 R16.1@5.617,4.275
DQS0R_N: R12.2 U1.B3 | length 12.7
  TOP w0.1: v1(4.822,6.521) 5.047,6.296 5.047,6.178 4.879,6.01 4.879,5.492 4.917,5.454 R12.2@4.917,5.025 ; v1(10.125,10.945) 10.845,10.945 U1.B3@11.273,10.517
  L3 w0.1: v1(4.822,6.521) 4.902,6.521 5.627,7.246 5.627,7.989 6.152,8.514 7.349,8.514 7.745,8.91 8.58,8.91 8.87,8.62 9.57,8.62 9.74,8.79 9.74,9.679 10.199,10.138 10.199,10.337 10.086,10.45 9.761,10.45 9.608,10.603 9.608,10.8 9.753,10.945 v1(10.125,10.945)
DQS0R_P: R16.2 U1.C3 | length 12.7
  TOP w0.1: v1(5.472,6.521) 5.472,6.32 5.079,5.927 5.079,5.575 5.292,5.362 5.292,5.35 R16.2@5.617,5.025 ; v1(10.125,11.545) 10.615,11.155 11.111,11.155 U1.C3@11.273,11.317
  L3 w0.1: v1(5.472,6.521) 5.472,6.792 5.827,7.147 5.827,7.906 6.235,8.314 7.432,8.314 7.828,8.71 8.497,8.71 8.787,8.42 9.653,8.42 9.94,8.707 9.94,9.596 10.409,10.065 10.409,10.7 10.52,10.811 10.52,11.09 10.32,11.29 10.31,11.29 10.125,11.475 v1(10.125,11.545)
DQS1_N: R76.1 X1.32 | length 3.5
  BOTTOM w0.1: X1.32@8.575,1.365 8.575,2.54 8.74,2.705 8.74,2.934 9.696,3.89 9.696,4.025 R76.1@9.446,4.275
DQS1_P: R81.1 X1.34 | length 3.5
  BOTTOM w0.1: X1.34@9.075,1.365 9.075,2.54 8.94,2.675 8.94,2.851 9.896,3.807 9.896,4.025 R81.1@10.146,4.275
DQS1R_N: R76.2 U8.B3 | length 11
  L6 w0.1: v1(9.221,10.945) 9.266,10.945 9.596,11.275 9.596,11.673 9.904,11.982 10.233,11.982 10.51,11.704 10.51,10.786 10.487,10.763 10.487,10.718 9.318,9.549 9.318,7.725 9.604,7.439 9.604,6.578 9.444,6.418 v1(9.399,6.418)
  BOTTOM w0.1: U8.B3@8.073,10.517 8.501,10.945 v1(9.221,10.945) ; v1(9.399,6.418) 9.624,6.193 9.624,5.707 9.67,5.661 9.67,5.249 R76.2@9.446,5.025
DQS1R_P: R81.2 U8.C3 | length 11
  L6 w0.1: v1(9.221,11.545) 9.221,11.581 9.821,12.181 10.316,12.181 10.71,11.787 10.71,10.703 10.629,10.621 9.518,9.511 9.518,7.808 9.804,7.522 9.804,6.663 v1(10.049,6.418)
  BOTTOM w0.1: U8.C3@8.073,11.317 8.235,11.155 8.731,11.155 v1(9.221,11.545) ; v1(10.049,6.418) 9.824,6.193 9.824,5.79 9.87,5.744 9.87,5.301 R81.2@10.146,5.025
DQS2_N: R13.1 X1.53 | length 3.2
  TOP w0.1: X1.53@13.825,1.365 13.825,2.54 13.98,2.695 13.98,3.457 14.303,3.78 14.303,4.025 R13.1@14.053,4.275
DQS2_P: R17.1 X1.55 | length 3.2
  TOP w0.1: X1.55@14.325,1.365 14.325,2.54 14.18,2.685 14.18,3.374 14.503,3.697 14.503,4.025 R17.1@14.753,4.275
DQS2R_N: R13.2 U2.B3 | length 13
  TOP w0.1: v1(14.03,5.657) 14.303,5.384 14.303,5.275 R13.2@14.053,5.025 ; v1(20.715,10.945) 21.335,10.945 U2.B3@21.763,10.517
  L3 w0.1: v1(14.03,5.657) 14.029,5.604 14.347,5.277 14.847,5.277 15.055,5.485 15.055,5.845 14.971,5.929 14.971,6.57 15.219,6.818 15.367,6.818 16.196,7.647 16.196,8.144 16.383,8.331 17.042,8.331 17.288,8.578 17.407,8.696 19.191,8.696 19.563,9.068 19.563,9.566 19.561,9.568 19.561,9.639 19.727,9.805 20.001,9.805 20.282,10.085 20.282,10.558 20.669,10.945 v1(20.715,10.945)
DQS2R_P: R17.2 U2.C3 | length 13
  TOP w0.1: v1(14.68,5.652) 14.503,5.475 14.503,5.275 R17.2@14.753,5.025 ; v1(20.715,11.545) 21.105,11.155 21.601,11.155 U2.C3@21.763,11.317
  L3 w0.1: v1(14.68,5.652) 14.771,5.743 14.771,6.653 15.136,7.018 15.285,7.018 15.996,7.73 15.996,8.227 16.3,8.531 16.959,8.531 17.324,8.896 19.108,8.896 19.363,9.151 19.363,9.483 19.361,9.485 19.361,9.722 19.644,10.005 19.918,10.005 20.082,10.168 20.082,10.641 20.34,10.899 20.34,11.204 20.118,11.426 20.118,11.65 20.272,11.804 20.456,11.804 v1(20.715,11.545)
DQS3_N: R77.1 X1.74 | length 3.3
  BOTTOM w0.1: R77.1@18.539,4.275 18.789,4.025 18.789,3.508 19.22,3.077 19.22,2.685 19.075,2.54 X1.74@19.075,1.365
DQS3_P: R82.1 X1.76 | length 3.3
  BOTTOM w0.1: R82.1@19.239,4.275 18.989,4.025 18.989,3.591 19.42,3.16 19.42,2.695 19.575,2.54 X1.76@19.575,1.365
DQS3R_N: R77.2 U7.B3 | length 10.9
  L6 w0.1: v1(18.349,6.418) 18.41,6.418 18.649,6.657 18.649,6.718 18.799,6.868 18.799,7.15 18.966,7.317 18.966,8.125 19.275,8.434 19.674,8.434 19.848,8.608 19.848,8.877 19.33,9.395 19.33,9.974 19.586,10.23 19.802,10.23 19.823,10.251 19.947,10.251 20.248,9.95 20.455,9.95 20.618,10.113 20.618,10.229 20.14,10.707 20.14,11.001 20.014,11.128 19.794,11.128 v1(19.611,10.945)
  BOTTOM w0.1: v1(18.349,6.418) 18.789,5.978 18.789,5.275 R77.2@18.539,5.025 ; U7.B3@18.563,10.517 18.991,10.945 v1(19.611,10.945)
DQS3R_P: R82.2 U7.C3 | length 10.9
  L6 w0.1: v1(18.999,6.418) 18.999,7.067 19.166,7.234 19.166,8.042 19.358,8.234 19.757,8.234 20.048,8.525 20.048,8.96 19.53,9.478 19.53,9.891 19.669,10.03 19.885,10.03 20.165,9.75 20.538,9.75 20.818,10.03 20.818,10.146 20.839,10.167 20.839,10.291 20.818,10.312 20.34,10.79 20.34,11.084 20.096,11.328 19.828,11.328 v1(19.611,11.545)
  BOTTOM w0.1: U7.C3@18.563,11.317 18.725,11.155 19.221,11.155 v1(19.611,11.545) ; v1(18.999,6.418) 18.989,6.408 18.989,5.275 R82.2@19.239,5.025
DQS4_N: R14.1 X1.177 | length 3.3
  TOP w0.1: R14.1@46.089,4.275 46.339,4.025 46.339,3.747 46.96,3.126 46.96,2.675 46.825,2.54 X1.177@46.825,1.365
DQS4_P: R18.1 X1.179 | length 3.3
  TOP w0.1: R18.1@46.789,4.275 46.539,4.025 46.539,3.83 47.16,3.209 47.16,2.705 47.325,2.54 X1.179@47.325,1.365
DQS4R_N: R14.2 U3.B3 | length 12
  TOP w0.1: v1(45.86,7.08) 46.052,6.888 46.052,6.325 46.208,6.169 46.32,6.057 46.32,5.581 46.089,5.35 R14.2@46.089,5.025 ; R14.2@46.089,4.95 R14.2@46.126,4.988 ; v1(46.755,10.945) 47.375,10.945 U3.B3@47.803,10.517
  L3 w0.1: v1(45.86,7.08) 45.918,7.022 46.107,7.022 46.152,7.067 46.152,7.224 46.39,7.462 46.39,8.189 46.168,8.411 45.915,8.411 45.655,8.151 45.531,8.151 45.51,8.172 45.33,8.172 45.066,8.436 45.066,8.815 45.599,9.348 45.599,9.529 45.419,9.709 45.419,10.175 45.801,10.557 46.237,10.557 46.501,10.292 46.723,10.292 47.228,10.797 47.228,11.005 47.098,11.135 46.913,11.135 46.755,10.977 v1(46.755,10.945)
DQS4R_P: R18.2 U3.C3 | length 11.9
  TOP w0.1: v1(46.502,7.079) 46.502,7.068 46.252,6.818 46.252,6.408 46.52,6.14 46.52,5.561 46.789,5.292 R18.2@46.789,5.025 ; v1(46.755,11.545) 47.145,11.155 47.641,11.155 U3.C3@47.803,11.317
  L3 w0.1: v1(46.502,7.079) 46.59,7.167 46.59,7.685 46.59,8.272 46.251,8.611 45.832,8.611 45.813,8.592 45.593,8.372 45.413,8.372 45.266,8.519 45.266,8.732 45.799,9.265 45.799,9.612 45.619,9.792 45.619,10.092 45.883,10.356 46.154,10.356 46.419,10.092 46.806,10.092 47.428,10.714 47.428,11.088 47.181,11.335 46.965,11.335 v1(46.755,11.545)
DQS5_N: R78.1 X1.198 | length 3.3
  BOTTOM w0.1: R78.1@51.376,4.275 51.626,4.025 51.626,3.707 52.22,3.113 52.22,2.685 52.075,2.54 X1.198@52.075,1.365
DQS5_P: R83.1 X1.200 | length 3.3
  BOTTOM w0.1: R83.1@52.076,4.275 51.826,4.025 51.826,3.79 52.42,3.196 52.42,2.695 52.575,2.54 X1.200@52.575,1.365
DQS5R_N: R78.2 U6.B3 | length 13.2
  L6 w0.1: v1(45.69,11.03) 45.736,11.03 46.66,11.954 46.974,11.954 47.233,11.695 47.233,10.86 46.802,10.429 46.802,10.415 46.721,10.334 46.721,9.063 47.638,8.146 48.296,8.146 50.046,6.396 50.333,6.396 50.542,6.188 50.542,6.03 50.398,5.886 50.398,5.672 50.536,5.534 50.671,5.534 v1(50.824,5.687)
  BOTTOM w0.1: U6.B3@44.603,10.517 45.041,10.955 45.178,10.955 45.199,10.934 45.323,10.934 45.419,11.03 v1(45.69,11.03) ; v1(50.824,5.687) 51.326,5.185 51.326,5.075 R78.2@51.376,5.025
DQS5R_P: R83.2 U6.C3 | length 13.2
  L6 w0.1: v1(45.651,11.545) 45.968,11.545 46.577,12.154 47.057,12.154 47.433,11.778 47.433,10.763 46.921,10.251 46.921,9.146 47.721,8.346 48.378,8.346 50.128,6.596 50.416,6.596 50.989,6.024 51.137,6.024 v1(51.474,5.687)
  BOTTOM w0.1: U6.C3@44.603,11.317 44.765,11.155 45.261,11.155 v1(45.651,11.545) ; v1(51.474,5.687) 52.026,5.135 52.026,5.075 R83.2@52.076,5.025
DQS6_N: R15.1 X1.219 | length 3.4
  TOP w0.1: R15.1@56.51,4.275 56.76,4.025 56.76,3.747 57.47,3.037 57.47,2.685 57.325,2.54 X1.219@57.325,1.365
DQS6_P: R19.1 X1.221 | length 3.4
  TOP w0.1: R19.1@57.21,4.275 56.96,4.025 56.96,3.83 57.67,3.12 57.67,2.695 57.825,2.54 X1.221@57.825,1.365
DQS6R_N: R15.2 U4.B3 | length 12.2
  TOP w0.1: R15.2@56.51,5.025 R15.2@56.51,5.072 ; v1(56.532,6.687) 56.87,6.349 56.87,5.44 ; v1(57.245,10.945) 57.865,10.945 U4.B3@58.293,10.517 ; R15.2@56.51,5.072 56.51,5.08 56.87,5.44 ; R15.2@56.51,5.072 56.87,5.432 56.87,5.44
  L3 w0.1: v1(56.532,6.687) 56.652,6.687 56.972,7.007 56.972,7.178 56.753,7.398 56.374,7.398 56.033,7.739 56.033,8.301 56.345,8.613 56.898,8.613 57.228,8.283 57.5,8.283 57.635,8.418 57.635,8.761 56.711,9.686 56.711,10.257 56.981,10.527 57.471,10.527 57.63,10.686 57.63,10.998 57.53,11.098 57.398,11.098 v1(57.245,10.945)
DQS6R_P: R19.2 U4.C3 | length 11.7
  TOP w0.1: v1(57.182,6.687) 57.07,6.575 57.07,5.165 R19.2@57.21,5.025 ; v1(57.245,11.545) 57.635,11.155 58.131,11.155 U4.C3@58.293,11.317
  L3 w0.1: v1(57.182,6.687) 57.182,7.251 56.835,7.598 56.457,7.598 56.233,7.822 56.233,8.218 56.428,8.413 56.815,8.413 57.145,8.083 57.583,8.083 57.835,8.335 57.835,8.844 56.911,9.769 56.911,10.174 57.064,10.327 57.554,10.327 57.83,10.603 57.83,11.085 57.607,11.308 57.458,11.308 57.245,11.52 v1(57.245,11.545)
DQS7_N: R79.1 X1.240 | length 3.5
  BOTTOM w0.1: R79.1@61.495,4.275 61.745,4.025 61.745,3.787 62.69,2.842 62.69,2.655 62.575,2.54 X1.240@62.575,1.365
DQS7_P: R84.1 X1.242 | length 3.5
  BOTTOM w0.1: R84.1@62.195,4.275 61.945,4.025 61.945,3.87 62.89,2.925 62.89,2.725 63.075,2.54 X1.242@63.075,1.365
DQS7R_N: R79.2 U5.B3 | length 12.6
  L6 w0.1: v1(56.19,11.04) 56.231,11.04 56.406,11.215 56.594,11.215 56.656,11.153 56.656,10.684 57.017,10.323 57.017,10.024 57.262,9.779 57.262,9.555 57.017,9.31 57.017,9.032 57.523,8.526 58.466,8.526 58.835,8.895 59.776,8.895 60.961,7.71 60.961,7.471 60.979,7.453 60.985,7.453 61.19,7.248 61.19,7.242 61.316,7.116 61.316,6.494 61.267,6.445 61.091,6.445 61.034,6.388 61.034,6.271 v1(61.192,6.113)
  BOTTOM w0.1: U5.B3@55.093,10.517 55.531,10.955 55.668,10.955 55.689,10.934 55.813,10.934 55.929,11.05 55.939,11.04 v1(56.19,11.04) ; v1(61.192,6.113) 61.027,5.947 61.027,5.869 61.204,5.692 61.261,5.692 61.495,5.458 R79.2@61.495,5.025
DQS7R_P: R84.2 U5.C3 | length 12.6
  L6 w0.1: v1(56.141,11.545) 56.276,11.545 56.406,11.415 56.677,11.415 56.856,11.236 56.856,10.767 57.217,10.406 57.217,10.107 57.462,9.862 57.462,9.472 57.217,9.227 57.217,9.115 57.606,8.726 58.383,8.726 58.752,9.095 59.859,9.095 61.161,7.793 61.161,7.56 61.39,7.331 61.39,7.325 61.516,7.199 61.516,6.593 61.526,6.584 61.542,6.567 61.542,5.906 v1(61.618,5.83)
  BOTTOM w0.1: U5.C3@55.093,11.317 55.255,11.155 55.751,11.155 v1(56.141,11.545) ; v1(61.618,5.83) 61.618,5.702 62.195,5.125 R84.2@62.195,5.025